# Altium PCB Lower1.1.PcbDoc (part 1 of 2)
Units mil, origin at the board's own origin, x right, y up, seen from the top; angles counter-clockwise.
Board outline 3366.33 x 5314.96 mil, 2 copper layers (Top Layer, Bottom Layer); 114 components, 117 nets, 417 pads, 111 vias.
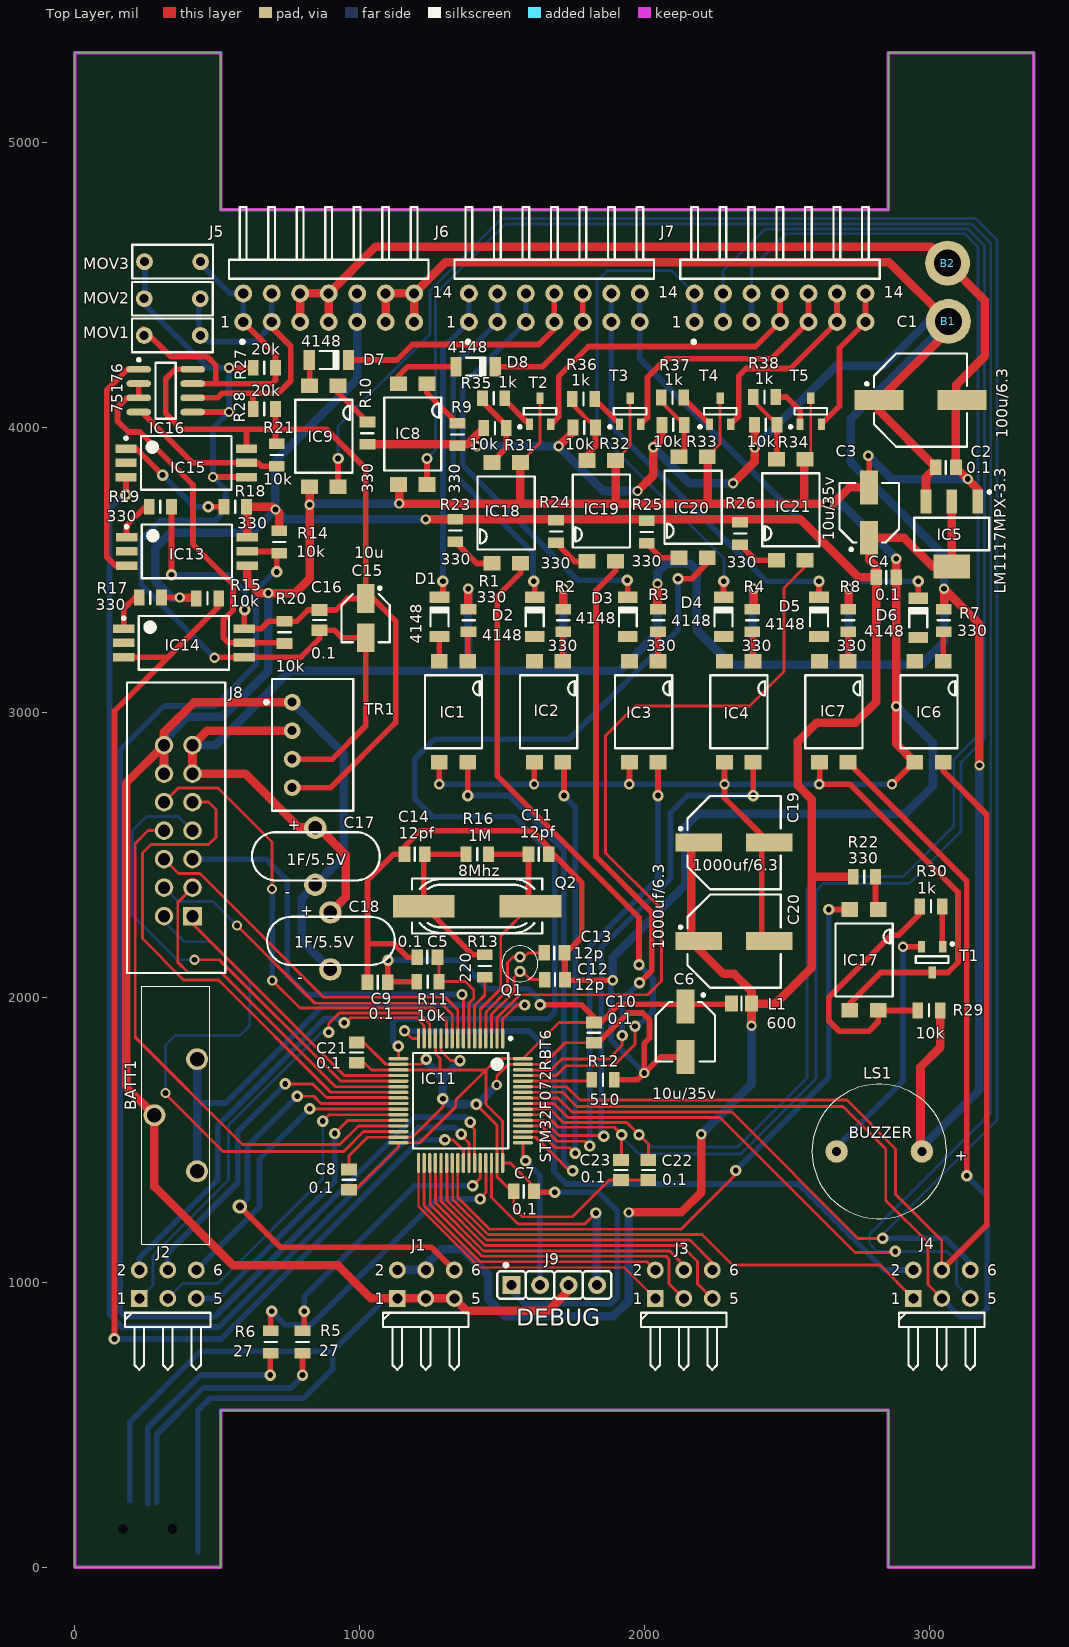
[diagram p0: Top Layer view]
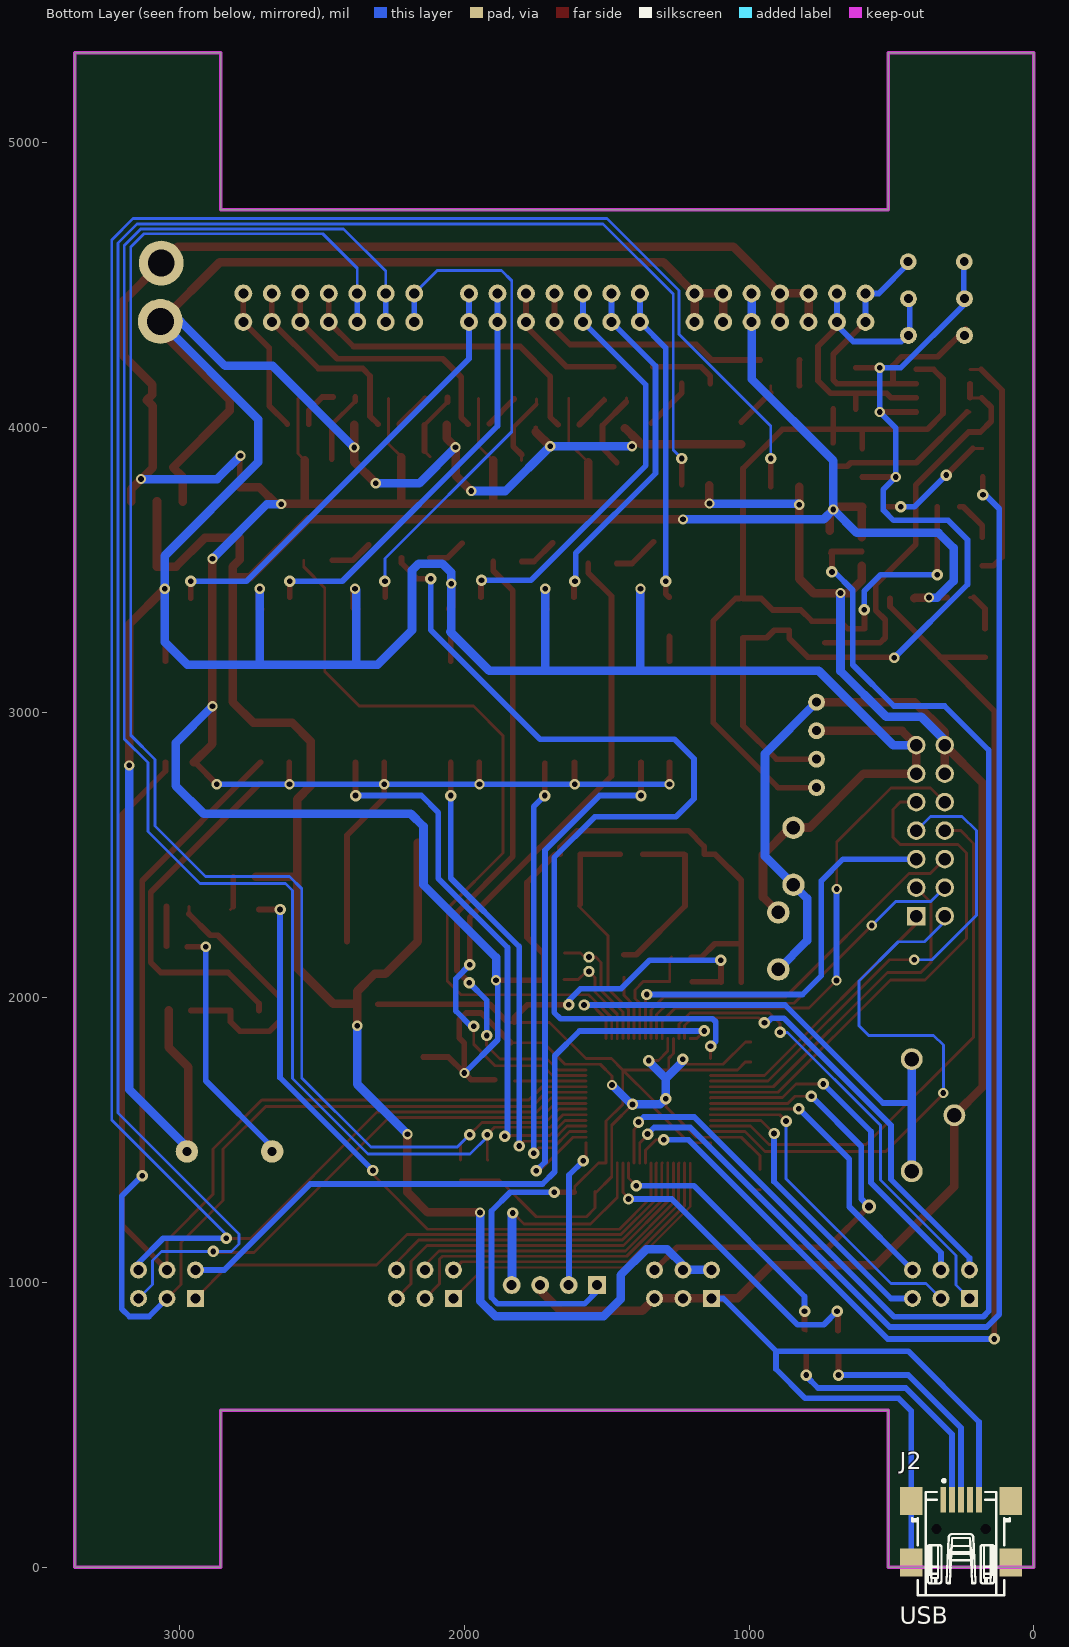
[diagram p1: Bottom Layer view, seen from below]
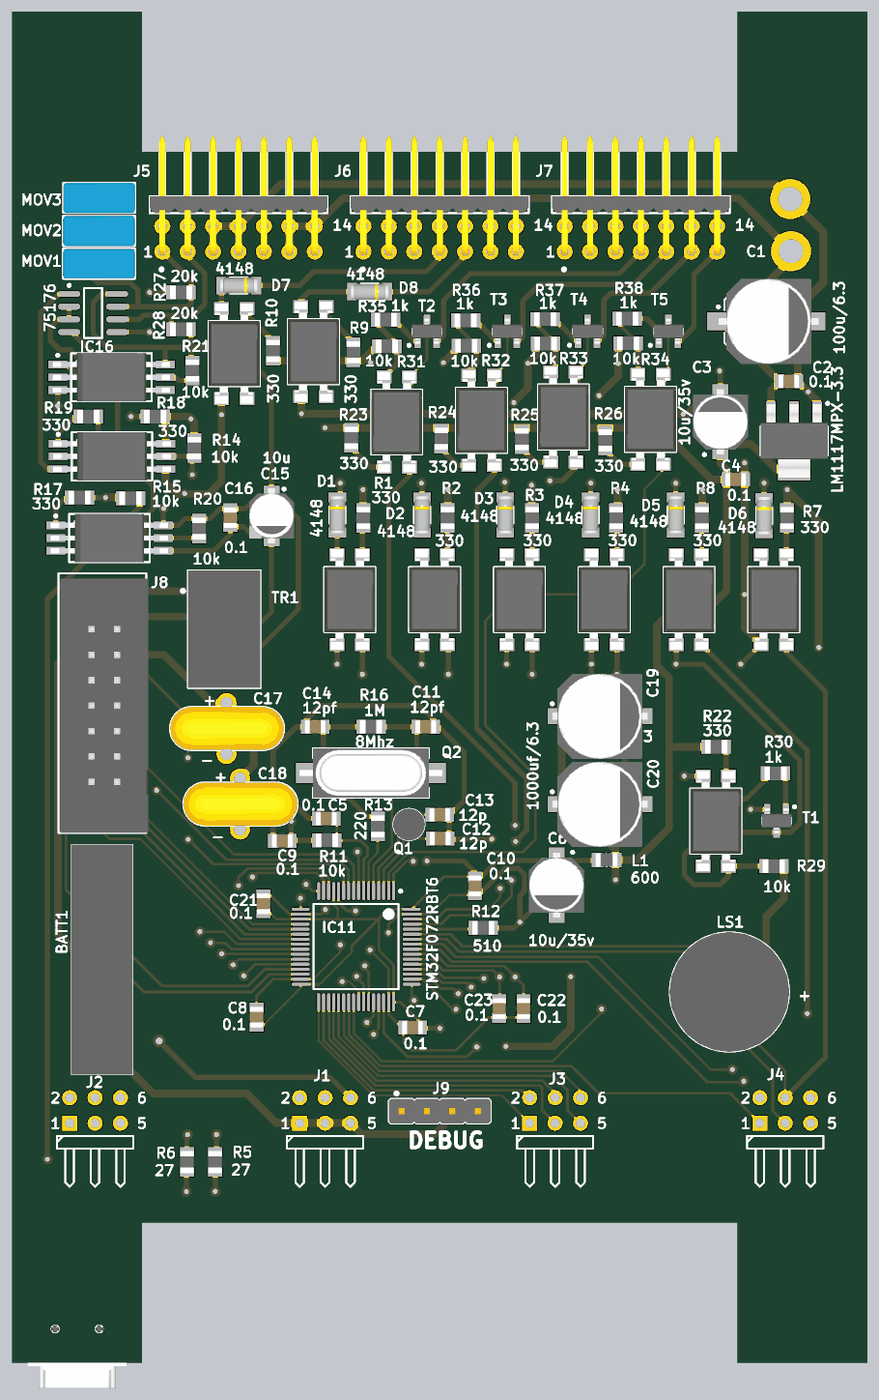
[diagram p3: 3D render of the assembled board from above, using the file's embedded part models]

## Layer stack, top to bottom
Top Solder: solder mask 0.4, Solder Resist, Dk 3.5
Top Layer: signal copper 1.4
Dielectric 1: dielectric 12.6, FR-4, Dk 4.8
Bottom Layer: signal copper 1.4
Bottom Solder: solder mask 0.4, Solder Resist, Dk 3.5

## Board outline
0,0 0,5314.96 511.81,5314.96 511.81,4763.78 2854.33,4763.78 2854.33,5314.96 3366.33,5314.96 3366.33,0 2854.52,0 2854.52,551.18 512,551.18 512,0

## Design rules (kind name [scope] priority, off if disabled: settings)
Clearance [All] p1: gap=7 ignorepadtopadclearanceinfootprint=FALSE
PolygonConnect [All] p1: connectstyle=Relief reliefconductorwidth=10 reliefentries=4 polygonreliefangle="90 Angle" airgapwidth=10
RoutingVias [All] p1: holewidth=28 width=50 viastyle="Through Hole" minholewidth=28 minwidth=50 maxholewidth=28 maxwidth=50
SolderMaskExpansion [All] p1: expansion=4
Width [All] p1: maxlimit=300 minlimit=7 preferedwidth=8
30 further rules are at their usual default settings.

## Components (designator, comment, footprint, x,y, rotation, side; value= is the part's Value field where it differs from the comment)
B1 "Plated Hole" MTG240_400 3066,4372 r90 top
B2 "Plated Hole" MTG240_400 3063,4577 r90 top
BATT1 "1074" 1074 429,1783 r270 top (schematic designator IC10)
C1 "100u/6.3" CAPAE830X1020N 2968,4096 r0 top value=100uF
C2 "0.1" CAPC2012X135N 3057,3860 r0 top value=100nF
C3 "10u/35v" CAPAE530X540N 2788,3701 r90 top value=10uF
C4 "0.1" CAPC2012X135N 2848,3474 r0 top value=100nF
C5 "0.1" CAPC2012X135N 1237,2141 r0 top value=100nF
C6 "10u/35v" CAPAE530X540N 2143,1879 r270 top value=10uF
C7 "0.1" CAPC2012X135N 1576,1319 r180 top value=100nF
C8 "0.1" CAPC2012X135N 962,1360 r90 top value=100nF
C9 "0.1" CAPC2012X135N 1063,2053 r180 top value=100nF
C10 "0.1" CAPC2012X135N 1822,1876 r270 top value=100nF
C11 "12pf" CAPC2012X135N 1628,2502 r180 top value=100nF
C12 "12p" CAPC2012X135N 1685,2062 r180 top value=12pF
C13 "12p" CAPC2012X135N 1683,2156 r0 top value=12pF
C14 "12pf" CAPC2012X135N 1193,2502 r180 top value=100nF
C15 "10u" CAPAE430X540N 1021,3331 r270 top value=10uF
C16 "0.1" CAPC2012X135N 859,3324 r270 top value=100nF
C17 "1F/5.5V" CAPRR590-430X1140X910 846,2495 r180 top
C18 "1F/5.5V" CAPRR590-430X1140X910 899,2198 r180 top
C19 "1000uf/6.3" CAPAE830X620N 2314,2543 r0 top
C20 "1000uf/6.3" CAPAE830X620N 2314,2197 r0 top
C21 "0.1" CAPC2012X135N 989,1806 r90 top value=100nF (schematic designator C8)
C22 "0.1" CAPC2012X135N 2013,1394 r270 top value=100nF (schematic designator C10)
C23 "0.1" CAPC2012X135N 1917,1394 r270 top value=100nF (schematic designator C10)
D1 "4148" DIOMELF3515N 1280,3335 r270 top
D2 "4148" DIOMELF3515N 1614,3335 r270 top
D3 "4148" DIOMELF3515N 1941,3335 r270 top
D4 "4148" DIOMELF3515N 2277,3335 r270 top
D5 "4148" DIOMELF3515N 2612,3335 r270 top
D6 "4148" DIOMELF3515N 2960,3332 r270 top
D7 "4148" DIOMELF3515N 892,4237 r180 top
D8 "4148" DIOMELF3515N 1407,4213 r180 top
IC1 "PC817" FAIRCHILD_FOD817DSD 1329,3002 r270 top
IC2 "PC817" FAIRCHILD_FOD817DSD 1662.8,3002 r270 top
IC3 "PC817" FAIRCHILD_FOD817DSD 1996.6,3002 r270 top
IC4 "PC817" FAIRCHILD_FOD817DSD 2330.4,3002 r270 top
IC5 "LM1117MPX-3.3" SOT230P700X180-4N 3078,3626 r270 top
IC6 "PC817" FAIRCHILD_FOD817DSD 2998,3002 r270 top
IC7 "PC817" FAIRCHILD_FOD817DSD 2664.2,3002 r270 top
IC8 "PC817" FAIRCHILD_FOD817DSD 1186,3977 r270 top
IC9 "PC817" FAIRCHILD_FOD817DSD 874,3969 r270 top
IC11 "STM32F072RBT6" LQFP64_N 1354,1637 r270 top
IC13 "ACPL-W60L-000E" SOIC127P1150X360-6N 393,3565 r0 top
IC14 "ACPL-W60L-000E" SOIC127P1150X360-6N 383,3244 r0 top
IC15 "ACPL-W60L-000E" SOIC127P1150X360-6N 391,3876 r0 top
IC16 "75176" SO8_N 319,4129 r0 top
IC17 "PC817" FAIRCHILD_FOD817DSD 2770,2131 r270 top
IC18 "PC817" FAIRCHILD_FOD817DSD 1514,3700 r90 top
IC19 "PC817" FAIRCHILD_FOD817DSD 1848,3707 r90 top
IC20 "PC817" FAIRCHILD_FOD817DSD 2170,3720 r90 top
IC21 "PC817" FAIRCHILD_FOD817DSD 2513,3711 r90 top
J1 "Header 3X2H" HDR2X3H 1131.92,943 r0 top locked (schematic designator P1)
J2 "Header 3X2H" HDR2X3H 226.38,943 r0 top locked (schematic designator P2)
J2 "USB" TYCO_1734035-1 255.91,236.22 r180 bottom
J3 "Header 3X2H" HDR2X3H 2037.46,943 r0 top locked (schematic designator P3)
J4 "Header 3X2H" HDR2X3H 2943,943 r0 top locked (schematic designator P4)
J5 "Header 14" STELVIO-KONTEK_3910401114400 891,4420.47 r0 top locked (schematic designator J1)
J6 "Header 14" STELVIO-KONTEK_3910401114400 1683,4420.47 r0 top locked (schematic designator J3)
J7 "Header 14" STELVIO-KONTEK_3910401114400 2475,4420.47 r0 top locked (schematic designator J4)
J8 "30314-6002HB" SHDR14W64P254_2X7_2540X878X955P 413,2285 r90 top (schematic designator J5)
J9 "DEBUG" COMATEL_385.0358.1.04.400 1533,990 r0 top (schematic designator W1)
L1 "600" INDC2012X105N 2340,1978 r180 top value=220R@100MHz
LS1 "CPI-137-12T" CMI1295IC0585T 2973,1459 r180 top
MOV1 "10nF" CAPR500-300X720X650 342,4323 r0 top
MOV2 "10nF" CAPR500-300X720X650 343,4582 r0 top
MOV3 "10nF" CAPR500-300X720X650 342,4452 r0 top
Q1 "32.768k" AB38T32768KHZ 1562,2091 r180 top
Q2 "8Mhz" XTAL1160X490X430 1412,2320.33 r0 top value=6MHz
R1 "330" RESC2012X60N 1382,3323 r90 top
R2 "330" RESC2012X60N 1714,3323 r90 top
R3 "330" RESC2012X60N 2047,3323 r90 top
R4 "330" RESC2012X60N 2378,3323 r90 top
R5 "27" RESC2012X60N 799,790 r270 top
R6 "27" RESC2012X60N 688,790 r270 top
R7 "330" RESC2012X60N 3050,3323 r90 top
R8 "330" RESC2012X60N 2715,3323 r90 top
R9 "330" RESC2012X60N 1343,3975 r270 top
R10 "330" RESC2012X60N 1027,3980 r270 top
R11 "10k" RESC2012X60N 1239,2055 r180 top
R12 "510" RESC2012X60N 1854,1711 r180 top
R13 "220" RESC2012X60N 1439,2110 r270 top
R14 "10k" RESC2012X60N 717,3598 r90 top
R15 "10k" RESC2012X60N 466,3400 r180 top
R16 "1M" RESC2012X60N 1412.47,2502 r180 top
R17 "330" RESC2012X60N 265,3403 r0 top
R18 "330" RESC2012X60N 563,3722 r0 top
R19 "330" RESC2012X60N 300,3722 r0 top
R20 "10k" RESC2012X60N 736,3281 r90 top
R21 "10k" RESC2012X60N 709,3903 r90 top
R22 "330" RESC2012X60N 2771,2423 r180 top
R23 "330" RESC2012X60N 1335,3638 r90 top
R24 "330" RESC2012X60N 1689,3635 r90 top
R25 "330" RESC2012X60N 2007,3633 r90 top
R26 "330" RESC2012X60N 2335,3628 r90 top
R27 "20k" RESC2012X60N 665,4210 r180 top
R28 "20k" RESC2012X60N 665,4065 r180 top
R29 "10k" RESC2012X60N 2998,1954 r0 top
R30 "1k" RESC2012X60N 3005,2319 r180 top
R31 "10k" RESC2012X60N 1475,3998 r180 top
R32 "10k" RESC2012X60N 1788,4000 r180 top
R33 "10k" RESC2012X60N 2100,4009 r180 top
R34 "10k" RESC2012X60N 2425,4010 r180 top
R35 "1k" RESC2012X60N 1470,4103 r180 top
R36 "1k" RESC2012X60N 1785,4100 r180 top
R37 "1k" RESC2012X60N 2098,4105 r180 top
R38 "1k" RESC2012X60N 2421,4107 r180 top
T1 "MMBT3906LT1G" SOT95P240X110-3N 3009,2132 r270 top
T2 "MMBT3906LT1G" SOT95P240X110-3N 1633,4057 r90 top
T3 "MMBT3906LT1G" SOT95P240X110-3N 1949,4057 r90 top
T4 "MMBT3906LT1G" SOT95P240X110-3N 2265,4057 r90 top
T5 "MMBT3906LT1G" SOT95P240X110-3N 2583,4057 r90 top
TR1 "Comment" DCDC_TRACO_TME24 763,2886 r270 top

## Footprints (in the part's own frame and the unit in brackets; to place one, negate y for a bottom-side part, rotate by r counter-clockwise, add the part's x,y. Pads: shape width x height; smd on the part's side, far side on the other; paste and mask are expansions set on the pad)
1074 [mm]
  round 1.95 hole 1.3: 1(0,0) 2(5,-3.8) 3(10,0)
  silkscreen extent -6.5,-4.95 16.5,1.15, body extent -6.5,-4.95 16.5,1.15, height 18.4
AB38T32768KHZ [mm]
  round 1 hole 0.55: 1(0,0) 2(0,-1.27)
  silkscreen extent -1.6,-2.27 1.6,0.92, body extent -1.6,-2.28 1.6,0.92, height 8.4
CAPAE430X540N [mm] "Capacitor, Aluminium Electrolytric, 4.3mm L X 4.3mm W X 5.4mm H, IPC Medium Density"
  rect 2.55x1.6 smd: 1(-1.75,0) 2(1.75,0)
  silkscreen extent -2.8,-2.15 2.15,2.15, body extent -2.75,-2.25 2.75,2.25, height 5.7
CAPAE530X540N [mm] "Capacitor, Aluminium Electrolytric, 5.3mm L X 5.3mm W X 5.4mm H, IPC Medium Density"
  rect 3x1.6 smd: 1(-2.25,0) 2(2.25,0)
  silkscreen extent -3.4,-2.65 2.65,2.65, body extent -3.25,-2.75 3.25,2.75, height 5.7
CAPAE830X620N [mm] "Capacitor, Aluminium Electrolytric, 8.3mm L X 8.3mm W X 6.2mm H, IPC Medium Density"
  rect 4.15x1.6 smd: 1(-3.15,0) 2(3.15,0)
  silkscreen extent -4.9,-4.15 4.15,4.15, body extent -4.75,-4.25 4.75,4.25, height 6.2
CAPAE830X1020N [mm] "Capacitor, Aluminium Electrolytric, 8.3mm L X 8.3mm W X 10.2mm H, IPC Medium Density"
  rect 4.4x1.8 smd: 1(-3.7,0) 2(3.7,0)
  silkscreen extent -4.9,-4.15 4.15,4.15, body extent -4.75,-4.25 5.25,4.25, height 10.2
CAPC2012X135N [mm] "Chip Capacitor, Body 2.0x1.25mm, IPC Medium Density"
  rect 1.05x1.4 smd: 1(-0.9,0) 2(0.9,0)
  silkscreen extent 0,-0.58 0,0.58, body extent -1.05,-0.67 1.05,0.68, height 1.25
CAPR500-300X720X650 [mm] "Capacitor Radial, Pin spacing 5.0mm - Body With 3.0mm X Body Length 7.2mm X Body Height 6.5mm"
  round 1.5 hole 0.8: 1(-2.5,0) 2(2.5,0)
  silkscreen extent -3.6,-1.5 3.6,1.5, body extent -3.6,-1.5 3.6,1.5, height 6.5
CAPRR590-430X1140X910 [mm] "Capacitor Radial Rounded, Pin spacing 5.9mm - Body With 4.3mm X Body Length 11.4mm X Body Height 9.1mm"
  round 2 hole 1.2: 1(0.051,-2.54) 2(0.051,2.54)
  silkscreen extent -5.7,-2.15 5.7,2.15, body extent -5.7,-2.15 5.7,2.15, height 10.95
CMI1295IC0585T [mm]
  round 2 hole 0.8: 1(0,0) 2(7.6,0)
  silkscreen extent -2.2,-6 9.8,6, body extent -2.2,-6 9.8,6, height 9.8
COMATEL_385.0358.1.04.400 [mm] "4 Contacts Straight Strip Header Pitch 2.54mm L=6.3mm ''Mini-Wire-Wrap''"
  rect 1.6x1.6 hole 0.9: 1(0,0)
  round 1.6 hole 0.9: 2(2.54,0) 3(5.08,0) 4(7.62,0)
  silkscreen extent -1.27,-1.22 8.89,1.93, body extent -1.27,-1.22 8.89,1.23, height 8
DCDC_TRACO_TME24 [mm] "TME Series , Body 11.75x7.25mm, SIP-4 Package"
  round 1.5 hole 0.8: 1(-3.81,0) 2(-1.27,0) 3(1.27,0) 4(3.81,0)
  silkscreen extent -5.88,-2.45 5.88,5.45, body extent -5.87,-1.8 5.88,5.45, height 10.45
DIOMELF3515N [mm] "SOD80C, MELF Diode, 2-Leads, Body 3.5x1.5mm, IPC Medium Density"
  rect 1x1.75 smd: 1(-1.75,0) 2(1.75,0)
  silkscreen extent -0.85,-0.8 0.85,0.8, body extent -1.85,-0.8 1.85,0.8, height 1.6
FAIRCHILD_FOD817DSD [mm] "SOIC, 2.54mm Pitch, 4 Pin, Body 6.5mm W X 4.6mm L X 4.6mm H"
  rect 1.3x1.5 smd: 1(-4.5,1.27) 2(-4.5,-1.27) 3(4.5,-1.27) 4(4.5,1.27)
  silkscreen extent -3.25,-2.55 3.25,2.55, body extent -5.01,-2.55 5.02,2.55, height 4.06
HDR2X3H [mm] "Connector; Header; 3x2 Position; Right Angle"
  rect 1.5x1.5 hole 0.9: 1(0,0)
  round 1.5 hole 0.9: 2(0,2.54) 3(2.54,0) 4(2.54,2.54) 5(5.08,0) 6(5.08,2.54)
  silkscreen extent -1.27,-6.35 6.35,-1.27
INDC2012X105N [mm] "Chip Inductor, EIA 0805, Metric 2012, Body 2.0x1.25mm, IPC Medium Density"
  rect 1.15x1.45 smd: 1(-0.9,0) 2(0.9,0)
  silkscreen extent 0,-0.6 0,0.6, body extent -1.1,-0.7 1.1,0.7, height 1.1
LQFP64_N [mm] "Thin QFP, 64-Leads, Body 10x10mm, Pitch 0.5mm, IPC Medium Density"
  oval 1.8x0.3 smd: 1(-5.55,3.75) 2(-5.55,3.25) 3(-5.55,2.75) 4(-5.55,2.25) 5(-5.55,1.75) 6(-5.55,1.25) 7(-5.55,0.75) 8(-5.55,0.25) 9(-5.55,-0.25) 10(-5.55,-0.75) 11(-5.55,-1.25) 12(-5.55,-1.75) 13(-5.55,-2.25) 14(-5.55,-2.75) 15(-5.55,-3.25) 16(-5.55,-3.75) 33(5.55,-3.75) 34(5.55,-3.25) 35(5.55,-2.75) 36(5.55,-2.25) 37(5.55,-1.75) 38(5.55,-1.25) 39(5.55,-0.75) 40(5.55,-0.25) 41(5.55,0.25) 42(5.55,0.75) 43(5.55,1.25) 44(5.55,1.75) 45(5.55,2.25) 46(5.55,2.75) 47(5.55,3.25) 48(5.55,3.75)
  oval 0.3x1.8 smd: 17(-3.75,-5.55) 18(-3.25,-5.55) 19(-2.75,-5.55) 20(-2.25,-5.55) 21(-1.75,-5.55) 22(-1.25,-5.55) 23(-0.75,-5.55) 24(-0.25,-5.55) 25(0.25,-5.55) 26(0.75,-5.55) 27(1.25,-5.55) 28(1.75,-5.55) 29(2.25,-5.55) 30(2.75,-5.55) 31(3.25,-5.55) 32(3.75,-5.55) 49(3.75,5.55) 50(3.25,5.55) 51(2.75,5.55) 52(2.25,5.55) 53(1.75,5.55) 54(1.25,5.55) 55(0.75,5.55) 56(0.25,5.55) 57(-0.25,5.55) 58(-0.75,5.55) 59(-1.25,5.55) 60(-1.75,5.55) 61(-2.25,5.55) 62(-2.75,5.55) 63(-3.25,5.55) 64(-3.75,5.55)
  silkscreen extent -5.67,-4.25 4.25,4.57, body extent -5,-5 5,5, height 1.6
MTG240_400 [mm] "Plated Through Hole: Hole Dia.=2.4mm Pad Dia.=4.0mm"
  round 4 hole 2.4: 1(0,0)
RESC2012X60N [mm] "Chip Resistor, EIA 0805, Metric 2012, Body 2.0x1.2mm, IPC Medium Density"
  rect 0.95x1.4 smd: 1(-1,0) 2(1,0)
  silkscreen extent 0,-0.55 0,0.55, body extent -1.1,-0.67 1.1,0.68, height 0.6
SHDR14W64P254_2X7_2540X878X955P [mm]
  rect 1.65x1.65 hole 1.1: 1(0,0)
  round 1.65 hole 1.1: 2(0,2.54) 3(2.54,0) 4(2.54,2.54) 5(5.08,0) 6(5.08,2.54) 7(7.62,0) 8(7.62,2.54) 9(10.16,0) 10(10.16,2.54) 11(12.7,0) 12(12.7,2.54) 13(15.24,0) 14(15.24,2.54)
  silkscreen extent -5.08,-2.93 20.83,5.85, body extent -5.08,-3.12 20.32,5.66, height 9.55
SO8_N [mm] "SOIC, 8-Leads, Body 4.9x3.9mm, Pitch 1.27mm, IPC Medium Density"
  oval 2.2x0.6 smd: 1(-2.4,1.905) 2(-2.4,0.635) 3(-2.4,-0.635) 4(-2.4,-1.905) 5(2.4,-1.905) 6(2.4,-0.635) 7(2.4,0.635) 8(2.4,1.905)
  silkscreen extent -2.52,-2.5 0.9,2.88, body extent -2,-2.5 2,2.5, height 1.75
SOIC127P1150X360-6N [mm] "SOIC, 1.27mm Pitch; 6 Pin, 6.90mm W X 4.70mm L X 3.60mm H Body, IPC Medium Density"
  rect 1.91x0.76 smd: 1(-5.37,1.27) 2(-5.37,0) 3(-5.37,-1.27) 4(5.37,-1.27) 5(5.37,0) 6(5.37,1.27)
  silkscreen extent -5.49,-2.4 4.02,2.4, body extent -5.87,-2.42 5.88,2.42, height 3.6
SOT95P240X110-3N [mm] "SOT23 3-Leads, Pitch 0.95mm - Body 1.3x2.9mm, IPC Medium Density"
  rect 1.05x0.65 smd: 1(-1.15,0.95) 2(-1.15,-0.95) 3(1.15,0)
  silkscreen extent -1.52,-1.45 0.3,1.92, body extent -1.25,-1.5 1.25,1.5, height 1.1
SOT230P700X180-4N [mm] "SOT223, 2.30mm pitch; 3 pin, 3.70mm W X 6.70mm L, IPC Medium Density"
  rect 2.15x0.95 smd: 1(-2.9,2.3) 2(-2.9,0) 3(-2.9,-2.3)
  rect 2.15x3.25 smd: 4(2.9,0)
  silkscreen extent -3.87,-3.35 1.45,3.48, body extent -3.65,-3.35 3.65,3.35, height 1.81
STELVIO-KONTEK_3910401114400 [mm] "14 Contacts - Pitch 2.54mm - Dual Row Right Angle Strip Header - Insulator 1.7mm"
  round 1.6 hole 0.9: 1(-7.62,-1.27) 2(-7.62,1.27) 3(-5.08,-1.27) 4(-5.08,1.27) 5(-2.54,-1.27) 6(-2.54,1.27) 7(0,-1.27) 8(0,1.27) 9(2.54,-1.27) 10(2.54,1.27) 11(5.08,-1.27) 12(5.08,1.27) 13(7.62,-1.27) 14(7.62,1.27)
  silkscreen extent -8.89,-3.2 8.89,8.97, body extent -8.89,-1.57 8.89,10.27, height 5.57
TYCO_1734035-1 [mm] "SMD, Right Angle, 5 Position, Type B, Mini USB Receptacle"
  rect 0.5x2.3 smd: 1(-1.575,0) 2(-0.8,0) 3(0,0) 4(0.8,0) 5(1.6,0)
  rect 2x2.5 smd: 6(-4.45,-5.6) 6(-4.45,-0.1) 6(4.45,-5.6) 6(4.45,-0.1)
  round 0.5 hole 0.9 unplated mask+0.2: MTG1(-2.2,-2.6) MTG2(2.2,-2.6)
  silkscreen extent -4.35,-8.5 4.35,1.82, body extent -4.95,-8.5 4.95,0.7, height 4.14
XTAL1160X490X430 [mm] "HC49/4H SMX Case, SMD Cristal, Body 11.6x4.9mm"
  rect 5.5x2 smd: 1(-4.75,0) 2(4.75,0)
  silkscreen extent -5.8,-2.45 5.8,2.45, body extent -7.15,-2.45 7.15,2.45, height 4.3

## Part data
B1 B2: library part PLATED_HOLE2.4_PAD4.0, "Single Terminal Socket", Author="CERN DEM JMW", ComponentHeight=0mm, Component Type="Standard (No BOM)", CreateDate=10/10/2554, Family="Plated Hole", LatestRevisionDate=10/10/2554, Mounted=No, PackageDescription="Plated Through Hole: Hole Dia.=2.4mm Pad Dia.=4.0mm", Part Description="Plated Through Hole: Hole Dia.=2.4mm Pad Dia.=4.0mm", Part Number=PLATED_HOLE2.4_PAD4.0, Pin Count=1, SMD=No, Socket=No, Status=None, Table=Pads
BATT1: "0197-0004-2", Manufacturer_Name="Keystone Electronics", Mouser2 Part Number=534-1074, Datasheet Link=https://componentsearchengine.com//1074.pdf, Height=18.3mm, Manufacturer_Part_Number=1074, Mouser2 Price/Stock=https://www.mouser.com/Search/Refine.aspx?Keyword=534-1074
C1: library part CAE830-1020_100UF_35V_20%, "0289-0158-4", Case=F, Manufacturer=GENERIC, Manufacturer1 ComponentHeight=10.2mm, Manufacturer1 Example=PANASONIC, Manufacturer1 Part Number=EEEFK1V101AP, Tolerance=±20%, Voltage=35V, Author="CERN DEM JLC", Component Type=Standard, CreateDate=3/12/2550, HelpURL=\\cern.ch\dfs\Applications\Altium\Datasheets\CAE_PANASONIC_FK.pdf, LatestRevisionDate=3/12/2550, Manufacturer Part Number=CAE830-1020_100UF_35V_20%, Mounted=Yes, Part Description="Aluminum Electrolytic SMT Capacitor", Part Number=CAE830-1020_100UF_35V_20%, Pin Count=2, SMD=Yes, Socket=No, Status="Not Recommended", Table="Capacitors SMD"
C2 C4 C5 C7 C8 C9 C10 C16 C21 C22 C23: library part CC0805_100NF_50V_10%_X7R, "0092-0004-8", Case=0805, Manufacturer=GENERIC, Manufacturer1 ComponentHeight=1.35mm, Manufacturer1 Example=EPCOS, Manufacturer1 Part Number=B37941K5104K62, Tolerance=±10%, Voltage=50V, Author="CERN DEM JLC", Component Type=Standard, CreateDate=3/12/2550, HelpURL=\\cern.ch\dfs\Applications\Altium\Datasheets\CC0805_X7R_EPCOS.pdf, LatestRevisionDate=3/12/2550, Manufacturer Part Number=CC0805_100NF_50V_10%_X7R, Mounted=Yes, Part Description="SMD Multilayer Chip Ceramic Capacitor", Part Number=CC0805_100NF_50V_10%_X7R, Pin Count=2, SMD=Yes, Socket=No, Status=Preferred, Table="Capacitors SMD", TC=X7R
C3 C6: library part CAE530-540_10UF_35V_20%, "0289-0032-3", Case=C, Manufacturer=GENERIC, Manufacturer1 ComponentHeight=5.8mm, Manufacturer1 Example=PANASONIC, Manufacturer1 Part Number=EEEFK1V100AR, Tolerance=±20%, Voltage=35V, Author="CERN DEM JLC", Component Type=Standard, CreateDate=3/12/2550, HelpURL=\\cern.ch\dfs\Applications\Altium\Datasheets\CAE_PANASONIC_FK.pdf, LatestRevisionDate=3/12/2550, Manufacturer Part Number=CAE530-540_10UF_35V_20%, Mounted=Yes, Part Description="Aluminum Electrolytic SMT Capacitor", Part Number=CAE530-540_10UF_35V_20%, Pin Count=2, SMD=Yes, Socket=No, Status="Not Recommended", Table="Capacitors SMD"
C11 C14: library part CC0805_100NF_50V_10%_X7R, "0306-0172-8", Case=0805, Manufacturer=GENERIC, Manufacturer1 ComponentHeight=1.35mm, Manufacturer1 Example=EPCOS, Manufacturer1 Part Number=B37941K5104K62, Tolerance=±10%, Voltage=50V, Author="CERN DEM JLC", Component Type=Standard, CreateDate=3/12/2550, HelpURL=\\cern.ch\dfs\Applications\Altium\Datasheets\CC0805_X7R_EPCOS.pdf, LatestRevisionDate=3/12/2550, Manufacturer Part Number=CC0805_100NF_50V_10%_X7R, Mounted=Yes, Part Description="SMD Multilayer Chip Ceramic Capacitor", Part Number=CC0805_100NF_50V_10%_X7R, Pin Count=2, SMD=Yes, Socket=No, Status=Preferred, Table="Capacitors SMD", TC=X7R
C12 C13: library part CC0805_12PF_50V_5%_NP0, "0306-0172-8", Case=0805, Manufacturer=GENERIC, Manufacturer1 ComponentHeight=1.35mm, Manufacturer1 Example=PHYCOMP, Manufacturer1 Part Number=223886115129, Tolerance=±5%, Voltage=50V, Author="CERN DEM JLC", Component Type=Standard, CreateDate=3/12/2550, HelpURL=\\cern.ch\dfs\Applications\Altium\Datasheets\CC0805_NP0_PHYCOMP.pdf, LatestRevisionDate=3/12/2550, Manufacturer Part Number=CC0805_12PF_50V_5%_NP0, Mounted=Yes, Part Description="SMD Multilayer Chip Ceramic Capacitor", Part Number=CC0805_12PF_50V_5%_NP0, Pin Count=2, SMD=Yes, Socket=No, Status=Preferred, Table="Capacitors SMD", TC=NP0
C15: library part CAE430-540_10UF_16V_20%, "0289-0167-5", Case=B, Manufacturer=GENERIC, Manufacturer1 ComponentHeight=5.8mm, Manufacturer1 Example=PANASONIC, Manufacturer1 Part Number=EEEFK1C100AR, Tolerance=±20%, Voltage=16V, Author="CERN DEM JLC", Component Type=Standard, CreateDate=3/12/2550, HelpURL=\\cern.ch\dfs\Applications\Altium\Datasheets\CAE_PANASONIC_FK.pdf, LatestRevisionDate=3/12/2550, Manufacturer Part Number=CAE430-540_10UF_16V_20%, Mounted=Yes, Part Description="Aluminum Electrolytic SMT Capacitor", Part Number=CAE430-540_10UF_16V_20%, Pin Count=2, SMD=Yes, Socket=No, Status="Not Recommended", Table="Capacitors SMD"
C17 C18: library part CMIC_39PF_500V_0.5PF_590-430X11400X910, "0102-0039-2 Super Capacitor"
C19 C20: library part CAE830-620_330UF_6.3V_20%, "0289-0158-4"
D1 D2 D3 D4 D5 D6 D7 D8: library part BZV55-B2V4, "0016-0201-3"
IC1 IC2 IC3 IC4 IC6 IC7 IC8 IC9 IC17 IC18 IC19 IC20 IC21: library part FOD817DSD, "0084-0064-6  opto", Case=SOIC4, Manufacturer="FAIRCHILD SEMICONDUCTOR", Author="CERN DEM JLC", ComponentHeight=4.6mm, Component Type=Standard, CreateDate=21/7/2557, Device=FOD817DSD, HelpURL=\\cern.ch\dfs\Applications\Altium\Datasheets\FOD817DSD.pdf, LatestRevisionDate=21/7/2557, Manufacturer Part Number=FOD817DSD, Mounted=Yes, PackageDescription="SOIC, 2.54mm Pitch, 4 Pin, Body 6.5mm W X 4.6mm L X 4.6mm H", Part Description="4-Pin High Operating Temperature Phototransistor Optocoupler", Part Number=FOD817DSD, Pin Count=4, SMD=Yes, Socket=No, Table=Optocouplers
IC5: library part LM1117MPX-ADJ/NOPB, "0083-0491-4", Case=SOT223, Manufacturer="NATIONAL SEMICONDUCTOR", Author="CERN DEM JLC", ComponentHeight=1.8mm, Component Type=Standard, CreateDate=5/7/2553, Device=LM1117MPX-ADJ/NOPB, HelpURL=\\cern.ch\dfs\Applications\Altium\Datasheets\LM1117MPX-ADJ-NOPB.pdf, LatestRevisionDate=5/7/2553, Manufacturer Part Number=LM1117MPX-ADJ/NOPB, Mounted=Yes, PackageDescription="SOT223, 2.30mm pitch; 3 pin, 3.70mm W X 6.70mm L, IPC Medium Density", Part Description="1.25V to 13.8V, 800mA, Adjustable Low-Dropout Linear Regulator", Part Number=LM1117MPX-ADJ/NOPB, Pin Count=4, SMD=Yes, Socket=No, Table=Regulators
IC11: library part STM32F103R8T6, "STM32 ARM-based 32-bit MCU with 64 Kbytes Flash, 64-pin LQFP, Industrial Temperature", ComponentLink1Description="Manufacturer Link", ComponentLink1URL=www.st.com/stm32, ComponentLink2Description=Datasheet, ComponentLink2URL=http://www.st.com/stonline/products/literature/ds/13587.pdf, DatasheetVersion="rev6, Mar-2008", PackageDescription="64-Pin Low-Profile Quad Flat Pack, 10 x 10 mm Body, 0.5 mm Pitch (LQFP64)", PackageReference=LQFP64, PackageVersion=Mar-2008, Published=30-May-2008, Publisher="Altium Limited"
IC13 IC14 IC15: "0087-0267-8", Case=SOIC6, Manufacturer="AVAGO TECHNOLOGIES", Author="CERN DEM JMW", ComponentHeight=3.6mm, Component Type=Standard, CreateDate=26/2/2557, Device=ACPL-W60L-000E, HelpURL=\\cern.ch\dfs\Applications\Altium\Datasheets\ACPL-W60L-000E.pdf, LatestRevisionDate=26/2/2557, Manufacturer Part Number=ACPL-W60L-000E, Mounted=Yes, PackageDescription="SOIC, 1.27mm Pitch; 6 Pin, 6.90mm W X 4.70mm L X 3.60mm H Body, IPC Medium Density", Part Description="High Speed LVTTL Compatible 3.3Volt/5Volt Optocoupler", Part Number=ACPL-W60L-000E, Pin Count=6, SMD=Yes, Socket=No, Table=Optocouplers
IC16: library part SN75176, "0086-0274-6"
J1 J2 J3 J4: "Header, 3-Pin, Dual row, Right Angle", LatestRevisionDate=17-Jul-2002, LatestRevisionNote="Re-released for DXP Platform.", Publisher="Altium Limited"
J2: library part TYCO_1734035-1, "0007-1328-2", Manufacturer="TYCO ELECTRONICS", Manufacturer Part Number=1734035-1, Author="CERN DEM JLC", ComponentHeight=3.95mm, Component Type=Standard, CreateDate=2/5/2554, Family=USB, HelpURL=\\cern.ch\dfs\Applications\Altium\Datasheets\TYCO_1734035-1.pdf, LatestRevisionDate=2/5/2554, Mounted=Yes, Part Description="5 Position, Right Angle, SMD Mini USB Type B Receptacle", Part Number=TYCO_1734035-1, Pin Count=6, SMD=Yes, Socket=No, Status=None, Table=TYCO
J5 J6 J7: library part STELVIO-KONTEK_3910401114400, "Connector 14 Male", Manufacturer=STELVIO-KONTEK, Manufacturer Part Number=3910401114400, Author="CERN DEM JLC", ComponentHeight=5.7mm, Component Type=Standard, CreateDate=29/8/2556, Family="Header 14", HelpURL=\\cern.ch\dfs\Applications\Altium\Datasheets\STELVIO-KONTEK_3910401114400.pdf, LatestRevisionDate=29/8/2556, Mounted=Yes, Part Description="14 Contacts - Pitch 2.54mm - Dual Row Right Angle Strip Header - Insulator 1.7mm", Part Number=STELVIO-KONTEK_3910401114400, Pin Count=14, SMD=No, Socket=No, Status=None, Table="STELVIO-KONTEK COMATEL"
J8: "0007-0649-2", Manufacturer_Name=3M, Datasheet Link=https://componentsearchengine.com/Datasheets/2/30314-6002HB.pdf, Height=9.554mm, Manufacturer_Part_Number=30314-6002HB
J9: library part COMATEL_385.0358.1.04.400, "4 Mini Wire-Wrap Contact Strip Header", Manufacturer="KONTEK COMATEL", Manufacturer Part Number=385.0358.1.04.400, Author="CERN DEM JLC", ComponentHeight=8mm, Component Type=Standard, CreateDate=30/6/2553, Family="Test Point", HelpURL=\\cern.ch\dfs\Applications\Altium\Datasheets\COMATEL_385.0358.1.04.400.pdf, LatestRevisionDate=10/10/2555, Mounted=Yes, Part Description="4 Contacts Straight Strip Header Pitch 2.54mm L=6.3mm ''Mini-Wire-Wrap''", Part Number=COMATEL_385.0358.1.04.400, Pin Count=4, SMD=No, Socket=No, Status="Not recommended", Table="STELVIO-KONTEK COMATEL"
L1: library part IND0805_MURATA_BLM21PG221SN1D, "0169-0010-4", Case=0805, Manufacturer=MURATA, Manufacturer Part Number=BLM21PG221SN1D, Power=2A, Resistance=0.05R, Tolerance=±25%, Author="CERN DEM JLC", ComponentHeight=1.05mm, Component Type=Standard, CreateDate=25/1/2553, HelpURL=\\cern.ch\dfs\Applications\Altium\Datasheets\IND0402_MURATA_BLM21P.pdf, LatestRevisionDate=25/1/2553, Mounted=Yes, Part Description="SMD EMIFIL Suppression Chip Ferrite Bead", Part Number=IND0805_MURATA_BLM21PG221SN1D, Pin Count=2, SMD=Yes, Socket=No, Status=None, Table="Inductors SMD"
LS1: "0044-0006-8  Buzzer", Manufacturer_Name="CUI Devices", Datasheet Link=https://componentsearchengine.com/Datasheets/1/CPI-137-12T.pdf, Height=8mm, Manufacturer_Part_Number=CPI-137-12T
MOV1 MOV2 MOV3: library part CPER_10NF_400V_10%_500-300X720X650, "0221-0014-7", Case="LS5 W3 x L7.2 x H6.5", Manufacturer=EPCOS, Manufacturer Part Number=B32529C6103K000, Tolerance=±10%, Voltage=400VDC/200VAC, Author="CERN DEM JLC", ComponentHeight=6.5mm, Component Type=Standard, CreateDate=23/3/2552, HelpURL=\\cern.ch\dfs\Applications\Altium\Datasheets\CPER_EPCOS_B32529.pdf, LatestRevisionDate=23/3/2552, Mounted=Yes, Part Description="Metallized Polyester Film Capacitor (MKT)", Part Number=CPER_10NF_400V_10%_500-300X720X650, Pin Count=2, SMD=No, Socket=No, Status=None, Table="Capacitors THD"
Q1: "0057-0038-2"
Q2: library part "XTAL_6MHZ_RAKON_HC49/4H SMX_20/50/10/16", "0900-0050-1", Manufacturer=RAKON, Manufacturer Part Number="6MHz HC49/4H SMX 20/50/10/16", Author="CERN DEM JMW", ComponentHeight=4.3mm, Component Type=Standard, CreateDate=7/10/2551, HelpURL=\\cern.ch\dfs\Applications\Altium\Datasheets\XTAL_RAKON_HC49-4HSMX.pdf, LatestRevisionDate=3/6/2553, Mounted=Yes, PackageDescription="HC49/4H SMX Case, SMD Cristal, Body 11.6x4.9mm", Part Description="Tolerance:± 20ppm, Stability:± 50ppm, -10°C to +70°C, 16pF, Surface Mount Quartz Crystal, HC49/4HSMX Serie", Part Number="XTAL_6MHZ_RAKON_HC49/4H SMX_20/50/10/16", Pin Count=2, SMD=Yes, Socket=No, Table="Crystals & Oscillators"
R1 R2 R3 R4 R7 R8 R9 R10 R17 R18 R19 R22 R23 R24 R25 R26: library part R0805_330R_1%_0.125W_100PPM, "0150-3297-4", Case=0805, Manufacturer=GENERIC, Manufacturer1 ComponentHeight=0.6mm, Manufacturer1 Example="NIC COMPONENT", Manufacturer1 Part Number=NRC10F3300TRF, Power=0.125W, Tolerance=±1%, Author="CERN DEM JLC", Component Type=Standard, CreateDate=3/12/2550, HelpURL=\\cern.ch\dfs\Applications\Altium\Datasheets\R0805_NIC_NRC.pdf, LatestRevisionDate=13/3/2551, Manufacturer Part Number=R0805_330R_1%_0.125W_100PPM, Mounted=Yes, Part Description="General Purpose Thick Film Chip Resistor", Part Number=R0805_330R_1%_0.125W_100PPM, Pin Count=2, SMD=Yes, Socket=No, Status=Preferred, Table="Resistors SMD", TC=±100ppm/°C
R5 R6: library part R0805_27R_1%_0.125W_100PPM, "0150-4381-1", Case=0805, Manufacturer=GENERIC, Manufacturer1 ComponentHeight=0.6mm, Manufacturer1 Example="NIC COMPONENT", Manufacturer1 Part Number=NRC10F27R0TRF, Power=0.125W, Tolerance=±1%, Author="CERN DEM JLC", Component Type=Standard, CreateDate=3/12/2550, HelpURL=\\cern.ch\dfs\Applications\Altium\Datasheets\R0805_NIC_NRC.pdf, LatestRevisionDate=13/3/2551, Manufacturer Part Number=R0805_27R_1%_0.125W_100PPM, Mounted=Yes, Part Description="General Purpose Thick Film Chip Resistor", Part Number=R0805_27R_1%_0.125W_100PPM, Pin Count=2, SMD=Yes, Socket=No, Status=Preferred, Table="Resistors SMD", TC=±100ppm/°C
R11 R14 R15 R20 R21 R29 R31 R32 R33 R34: library part R0805_10K_0.1%_0.1W_10PPM, "0176-0426-3", Case=0805, Manufacturer=GENERIC, Manufacturer1 ComponentHeight=0.6mm, Manufacturer1 Example="TYCO HOLSWORTHY", Manufacturer1 Part Number=RN73C2A10KBTG, Power=0.1W, Tolerance=±0.1%, Author="CERN DEM JLC", Component Type=Standard, CreateDate=3/12/2550, HelpURL=\\cern.ch\dfs\Applications\Altium\Datasheets\R0805_Tyco_RN73.pdf, LatestRevisionDate=13/3/2551, Manufacturer Part Number=R0805_10K_0.1%_0.1W_10PPM, Mounted=Yes, Part Description="Thin Film Chip Resistor", Part Number=R0805_10K_0.1%_0.1W_10PPM, Pin Count=2, SMD=Yes, Socket=No, Status="Not recommended", Table="Resistors SMD", TC=±10ppm
R12: library part R0805_510R_1%_0.125W_100PPM, "Resistor - 1%", Case=0805, Manufacturer=GENERIC, Manufacturer1 ComponentHeight=0.6mm, Manufacturer1 Example="NIC COMPONENT", Manufacturer1 Part Number=NRC10F5100TRF, Power=0.125W, Tolerance=±1%, Author="CERN DEM JLC", Component Type=Standard, CreateDate=3/12/2550, HelpURL=\\cern.ch\dfs\Applications\Altium\Datasheets\R0805_NIC_NRC.pdf, LatestRevisionDate=13/3/2551, Manufacturer Part Number=R0805_510R_1%_0.125W_100PPM, Mounted=Yes, Part Description="General Purpose Thick Film Chip Resistor", Part Number=R0805_510R_1%_0.125W_100PPM, Pin Count=2, SMD=Yes, Socket=No, Status=Preferred, Table="Resistors SMD", TC=±100ppm/°C
R13: library part R0805_220R_1%_0.125W_100PPM, "0150-1917-5 Resistor - 1%", Case=0805, Manufacturer=GENERIC, Manufacturer1 ComponentHeight=0.6mm, Manufacturer1 Example="NIC COMPONENT", Manufacturer1 Part Number=NRC10F2200TRF, Power=0.125W, Tolerance=±1%, Author="CERN DEM JLC", Component Type=Standard, CreateDate=3/12/2550, HelpURL=\\cern.ch\dfs\Applications\Altium\Datasheets\R0805_NIC_NRC.pdf, LatestRevisionDate=13/3/2551, Manufacturer Part Number=R0805_220R_1%_0.125W_100PPM, Mounted=Yes, Part Description="General Purpose Thick Film Chip Resistor", Part Number=R0805_220R_1%_0.125W_100PPM, Pin Count=2, SMD=Yes, Socket=No, Status=Preferred, Table="Resistors SMD", TC=±100ppm/°C
R16: library part R0805_1M_1%_0.125W_100PPM, "Resistor - 1%", Case=0805, Manufacturer=GENERIC, Manufacturer1 ComponentHeight=0.6mm, Manufacturer1 Example="NIC COMPONENT", Manufacturer1 Part Number=NRC10F1004TRF, Power=0.125W, Tolerance=±1%, Author="CERN DEM JLC", Component Type=Standard, CreateDate=3/12/2550, HelpURL=\\cern.ch\dfs\Applications\Altium\Datasheets\R0805_NIC_NRC.pdf, LatestRevisionDate=13/3/2551, Manufacturer Part Number=R0805_1M_1%_0.125W_100PPM, Mounted=Yes, Part Description="General Purpose Thick Film Chip Resistor", Part Number=R0805_1M_1%_0.125W_100PPM, Pin Count=2, SMD=Yes, Socket=No, Status=Preferred, Table="Resistors SMD", TC=±100ppm/°C
R27 R28: library part R0805_20K_1%_0.125W_100PPM, "0176-0560-6", Case=0805, Manufacturer=GENERIC, Manufacturer1 ComponentHeight=0.6mm, Manufacturer1 Example="NIC COMPONENT", Manufacturer1 Part Number=NRC10F2002TRF, Power=0.125W, Tolerance=±1%, Author="CERN DEM JLC", Component Type=Standard, CreateDate=3/12/2550, HelpURL=\\cern.ch\dfs\Applications\Altium\Datasheets\R0805_NIC_NRC.pdf, LatestRevisionDate=13/3/2551, Manufacturer Part Number=R0805_20K_1%_0.125W_100PPM, Mounted=Yes, Part Description="General Purpose Thick Film Chip Resistor", Part Number=R0805_20K_1%_0.125W_100PPM, Pin Count=2, SMD=Yes, Socket=No, Status=Preferred, Table="Resistors SMD", TC=±100ppm/°C
R30 R35 R36 R37 R38: library part R0805_1K_1%_0.125W_100PPM, "0176-0313-5", Case=0805, Manufacturer=GENERIC, Manufacturer1 ComponentHeight=0.6mm, Manufacturer1 Example="NIC COMPONENT", Manufacturer1 Part Number=NRC10F1001TRF, Power=0.125W, Tolerance=±1%, Author="CERN DEM JLC", Component Type=Standard, CreateDate=3/12/2550, HelpURL=\\cern.ch\dfs\Applications\Altium\Datasheets\R0805_NIC_NRC.pdf, LatestRevisionDate=13/3/2551, Manufacturer Part Number=R0805_1K_1%_0.125W_100PPM, Mounted=Yes, Part Description="General Purpose Thick Film Chip Resistor", Part Number=R0805_1K_1%_0.125W_100PPM, Pin Count=2, SMD=Yes, Socket=No, Status=Preferred, Table="Resistors SMD", TC=±100ppm/°C
T1 T2 T3 T4 T5: library part BSR18A, "0235-0223-4", Case=SOT23-3, Manufacturer="FAIRCHILD SEMICONDUCTOR", Author="CERN DEM JLC", ComponentHeight=1.3mm, Component Type=Standard, CreateDate=15/5/2551, Device=BSR18A, HelpURL=\\cern.ch\dfs\Applications\Altium\Datasheets\BSR18A.pdf, LatestRevisionDate=15/5/2551, Manufacturer Part Number=BSR18A, Mounted=Yes, PackageDescription="SOT23 3-Leads, Pitch 0.95mm - Body 1.4x3mm, IPC Medium Density", Part Description="40V 200mA PNP General-Purpose Amplifier", Part Number=BSR18A, Pin Count=3, SMD=Yes, Socket=No, Table=Transistors
TR1: library part "TME 2405S", "0658-0026-9 Isolated"

## Via types
v1: diameter 40, hole 20, Top Layer to Bottom Layer, tented both sides, 64 vias
v2: diameter 36, hole 20, Top Layer to Bottom Layer, tented both sides, 46 vias
v3: diameter 50, hole 28, Top Layer to Bottom Layer, tented both sides, 1 vias

## Nets (pads, with @x,y where several pads share a name; then routed paths per layer and width w, separated by ;. In a path a pad name is that pad's centre, name@x,y a point inside that pad or via, vN(x,y) a via of type N, cw(c..) or ccw(c..) an arc to the next point about the centre after c; other vN are vias at no path point)
+12: B1.1 C1.1 C2.1 C17.1 C18.1 IC5.3 J5.11 J5.12 J5.13 J5.14 J8.11 J8.13 LS1.1 R1.2 R2.2 R3.2 R4.2 R7.2 R8.2 R9.2 R10.2 R29.2 R31.2 R32.2 R33.2 R34.2 TR1.2 | length 16283.1
  Top Layer w15: R32.2@1748.63,3984.63 R32.2@1748.63,4000 ; v2@2385.63,3930.37 v2(2386,3930)
  Top Layer w30: TR1.2@763,2935 463,2935 J8.13@413,2885 J8.11@413,2785 598,2785 787,2596 C17.1@849,2596 ; C17.1@844,2595 856,2595 951,2500 951,2352 C18.1@897,2298 ; R10.2@1027,3940.63 1378.26,3940.63 1394.31,3956.69 ; J5.11@1091,4370.47 J5.12@1091,4470.47 J5.14@1191,4470.47 ; J5.13@1191,4370.47 J5.14@1191,4470.47 ; v2(1381,3434) 1381,3363.37 R1.2@1382,3362.37 ; v2(1411,3934) 1394.31,3950.69 1394.31,3956.69 ; R31.2@1435.63,3998 1394.31,3956.69 ; v2(1698,3934) R32.2@1748.63,3984.63 ; R2.2@1714,3362.37 1715,3363.37 v2(1715,3434) ; v2(1975,3777) 2030,3832 v2(2030,3931) 2060.63,3961.63 R33.2@2060.63,4009 ; v2(2045,3452) 2045,3368.37 2049,3364.37 R3.2@2047,3362.37 ; v2(2310,3804) 2386,3880 v2(2386,3930) ; R4.2@2378,3362.37 2383,3367.37 v2(2383,3434) ; v2@2385.63,3930.37 R34.2@2385.63,4010 ; R8.2@2715,3362.37 2717,3364.37 v2(2717,3434) ; LS1.1@2968.21,1469 2968.21,1755.21 3037.37,1824.37 R29.2@3037.37,1954 ; IC5.3@2987.45,3740.17 2987.45,3825.88 C2.1@3021.57,3860 2822.33,4059.24 C1.1@2822.33,4096 3066,4339.67 B1.1@3066,4372 2858,4580 1300.53,4580 J5.14@1191,4470.47 ; R7.2@3050,3362.37 3051,3363.37 v2(3051,3434) 3175,3310 v2(3175,2814)
  Bottom Layer w15: v2@2379,3430 v2(2383,3434) ; 2715,3167 2717,3169 ; B1.1@2995,4372 B1.1@3066,4372
  Bottom Layer w30: J8.13@413,2885 494,2885 755,3146 1715,3146 ; 1381,3152 v2(1381,3434) ; v2(1411,3934) v2(1698,3934) 1855,3777 v2(1975,3777) ; v2(1715,3434) 1715,3146 ; v2(2030,3931) 2157,3804 v2(2310,3804) ; v2@2379,3430 2379,3167 ; v2(2386,3930) 2672,4216 2839,4216 B1.1@2995,4372 ; 2717,3169 v2(2717,3434) ; LS1.1@2968.21,1469 3175,1675.79 v2(3175,2814) ; B1.1@3066,4372 2723,4029 2723,3878 3051,3550 v2(3051,3434) 3051,3247 2971,3167 2715,3167 2379,3167 ; 1715,3146 1912,3146 2049,3283 2045,3287 v2(2045,3452) 2045,3491 2076,3522 2160,3522 2183,3499 2183,3288 2304,3167 2379,3167
AUTOMAN_btn: D6.1 J6.13 J6.14 | length 1589.1
  Top Layer w20: D6.1@2960,3400.9 v1(2960,3460)
  Bottom Layer w20: J6.14@1983,4470.47 J6.13@1983,4370.47 1983,4241 2764,3460 v1(2960,3460)
Btn_DW: IC9.4 IC11.57 J4.6 | length 8454.2
  Top Layer w10: IC11.57@1572.5,1646.84 1695.16,1646.84 1745,1597 2306,1597 2749,1154 v1(2835,1154)
  Top Layer w20: IC9.4@924,3791.83 v1(924,3891)
  Bottom Layer w10: v1(924,3891) 924,4005 1246,4327 1246,4481 1498,4733 3162,4733 3237,4658 3237,1953.04 3237,1891.96 3237,1569 2835,1167 v1(2835,1154) ; J4.6@3143,1043 J4.6@3143,1067
  Bottom Layer w20: v1(2835,1154) 3056,1154 J4.6@3143,1067
Btn_EN: IC7.4 IC11.58 J4.3 | length 4277.9
  Top Layer w10: IC11.58@1572.5,1666.53 1711.47,1666.53 1761,1617 2696,1617 2846,1467 2846,1287 2994,1139 2994,992 J4.3@3043,943
  Top Layer w20: IC7.4@2714.2,2824.83 3130,2409.03 v1(3130,1374)
  Bottom Layer w20: J4.3@3043,943 3106,880 3175,880 3202,907 3202,1302 v1(3130,1374)
Btn_UP: IC8.4 IC11.56 J4.5 | length 8457.8
  Top Layer w10: IC11.56@1572.5,1627.16 1680.84,1627.16 1730,1578 2264,1578 2738,1104 2880,1104 v1(2880,1108)
  Top Layer w20: IC8.4@1236,3799.83 v1(1236,3891)
  Bottom Layer w10: v1(1236,3891) 1266,3921 1266,4468 1512,4714 3148,4714 3215,4647 3215,1951 3215,1594 2790,1169 2790,1134 2816,1108 v1(2880,1108) 3062,1108 3094,1076 3094,992 J4.5@3143,943
Buzzer: IC11.40 IC17.2 | length 2362.1
  Top Layer w10: IC11.40@1344.16,1418.5 1344.16,1296.97 1455.12,1186 2128,1186 2320,1378 v1(2320,1392)
  Top Layer w20: v1(2646,2308.17) IC17.2@2720,2308.17
  Bottom Layer w20: v1(2320,1392) 2646,1718 v1(2646,2308.17)
Command_out1: C22.1 IC11.55 J7.5 J7.6 | length 5646.7
  Top Layer w10: IC11.55@1572.5,1607.47 1667.53,1607.47 1714,1561 1937,1561 v1(1980,1518) 2013,1485 C22.1@2013,1429.43
  Bottom Layer w10: v1(1980,1518) 2024,1474 2327,1474 2570,1717 2570,2381 2613,2424 2908,2424 3085,2601 3085,2835 3170,2920 3170,4634 3124,4680 2496,4680 2375,4559 J7.6@2375,4470.47
  Bottom Layer w20: J7.5@2375,4370.47 J7.6@2375,4470.47
Command_out2: C23.1 IC11.54 J7.3 J7.4 | length 5817.4
  Top Layer w10: IC11.54@1572.5,1587.79 1653.21,1587.79 1697,1544 1893,1544 v1(1919,1518) 1919,1431.43 C23.1@1917,1429.43
  Bottom Layer w10: v1(1919,1518) 1919,1510 1979,1450 2337,1450 2602,1715 2602,2375 2626.5,2399.5 2927.5,2399.5 3110,2582 3110,2824 3193,2907 3193,2966 3193,4639 3135,4697 2423,4697 2275,4549 J7.4@2275,4470.47
  Bottom Layer w20: J7.3@2275,4370.47 J7.4@2275,4470.47
D1_2: D1.2 IC1.2 | length 88.5
  Top Layer w20: D1.2@1280,3266.1 1279,3265.1 IC1.2@1279,3179.17 IC1.2@1280.17,3179.17
D2_2: 
D3.3V: C3.1 C4.1 C19.1 C20.1 IC5.2 IC5.4 IC13.6 J1.2 J1.4 J5.9 J5.10 L1.1 R14.2 R15.2 R17.2 R18.2 R22.2 R23.2 R24.2 R25.2 R26.2 | length 9933.7
  Top Layer w10: R15.2@420,3400 R15.2@426.63,3400 R15.2@430.63,3400 ; R18.2@602.37,3722 R18.2@604.42,3719.95 ; v2@695,3722 v2@717,3700
  Top Layer w20: R17.2@304.37,3403 v2(368,3403)
  Top Layer w30: v2(368,3403) 417,3403 R15.2@420,3400 ; R18.2@602.37,3722 v2@695,3722 ; IC13.6@604.42,3615 R18.2@604.42,3719.95 ; R14.2@717,3637.37 v2@717,3700 ; v2(1231.63,3677.37) R23.2@1335,3677.37 2547.63,3677.37 2751,3474 C4.1@2812.57,3474 ; v2(1944,1245) 2128,1245 2199,1316 v2(2199,1519) ; C19.1@2162.98,2542 2162.98,2196 2276.98,2082 2314,2082 2375,2021 L1.1@2375,1977.57 ; v2(2375,1900) L1.1@2375,1977.57 ; R22.2@2731.63,2423 2589,2423 2586,2426 ; IC5.2@3078,3740.17 IC5.4@3078,3511.83 3011.17,3511.83 2910.58,3612.42 C3.1@2788,3612.42 2788,3536 2812.57,3511.43 C4.1@2812.57,3474 ; L1.1@2375,1977.57 2459.57,1977.57 2586,2104 2586,2426 ; 2586,2426 2586,2695 2538,2743 2538,2898 2604,2964 2740,2964 2812.57,3036.57 C4.1@2812.57,3474
  Bottom Layer w10: J1.4@1231.92,1043 J1.4@1231.92,1059.92 ; v2(1944,1245) v2@1944,1250
  Bottom Layer w30: v2(368,3403) 340,3403 282,3461 282,3577 335,3630 622,3630 v2(704,3712) ; J5.10@991,4470.47 J5.9@991,4370.47 991,4170 704,3883 v2(704,3712) ; J1.2@1131.92,1043 J1.4@1231.92,1043 ; v2@1224,3678 738,3678 v2(704,3712) ; J1.4@1231.92,1059.92 1287,1115 1361,1115 1451,1025 1451,940 1510,881 1891,881 1944,934 v2(1944,1245) ; v2(2199,1519) 2375,1695 v2(2375,1900)
D3_2: 
D4_2: 
D5_2: 
D6_2: 
D7_2: D7.2 IC9.2 | length 92.5
  Top Layer w20: IC9.2@823.1,4147.06 IC9.2@824,4146.17 824,4236.1 D7.2@823.1,4237
D8_2: D8.2 IC8.2 | length 242.2
  Top Layer w20: IC8.2@1136,4154.17 1136,4181 1168,4213 D8.2@1338.1,4213
Digital_in1: IC1.4 IC11.50 | length 1894.6
  Top Layer w10: IC11.50@1572.5,1509.05 1617.95,1509.05 1736,1391 v1(1747,1391)
  Top Layer w20: v1(1379,2708) IC1.4@1379,2824.83
  Bottom Layer w20: v1(1379,2708) 1524,2708 1716,2516 1716,1422 v1(1747,1391)
Digital_in2: IC2.4 IC11.51 | length 1604.6
  Top Layer w10: IC11.51@1572.5,1528.73 1630.27,1528.73 1687,1472 1737,1472 v1(1756,1453) ; IC2.4@1712.8,2824.83 IC2.4@1717,2820.63
  Top Layer w20: v1(1717,2708) IC2.4@1717,2820.63
  Bottom Layer w20: v1(1717,2708) 1756,2669 v1(1756,1453)
Digital_in3: IC3.4 IC11.52 | length 1710.1
  Top Layer w10: IC11.52@1572.5,1548.42 1638.58,1548.42 1692,1495 1790,1495 v1(1807,1478) ; IC3.4@2046.6,2824.83 IC3.4@2047,2824.43
  Top Layer w20: v1(2047,2708) IC3.4@2047,2824.43
  Bottom Layer w20: v1(1807,1478) 1807,2178 2047,2418 v1(2047,2708)
Digital_in4: IC4.4 IC11.53 | length 1980.6
  Top Layer w10: IC11.53@1572.5,1568.1 1645.9,1568.1 1699,1515 1854,1515 v1(1857,1512) ; IC4.4@2380.4,2824.83 IC4.4@2381,2824.23
  Top Layer w20: v1(2381,2708) IC4.4@2381,2824.23
  Bottom Layer w10: v1@1848,1521 v1(1857,1512)
  Bottom Layer w20: v1@1848,1521 1848,2175 2090.5,2417.5 2090.5,2648.5 2150,2708 v1(2381,2708)
DW_btn: D7.1 J6.7 J6.8 | length 891.7
  Top Layer w10: J6.7@1683,4346 J6.7@1683,4370.47
  Top Layer w20: D7.1@960.9,4237 1131,4237 1185,4291 1628,4291 J6.7@1683,4346 ; J6.7@1683,4370.47 J6.8@1683,4470.47
ENT_btn: D5.1 J6.11 J6.12 | length 1476.3
  Top Layer w20: D5.1@2612,3403.9 v1(2612,3460)
  Bottom Layer w20: J6.12@1883,4470.47 J6.11@1883,4370.47 1883,4005 2428,3460 v1(2612,3460)
EXTI1: IC11.8 J8.5 | length 1494.3
  Top Layer w10: v1(1359,2010) 1363.84,2005.16 IC11.8@1363.84,1855.5
  Bottom Layer w20: J8.5@413,2485 670,2485 746,2409 746,2076 812,2010 v1(1359,2010)
EXTI2: IC11.9 J8.6 | length 1350.7
  Top Layer w10: J8.6@313,2485 364,2434 439,2434 873,2000 1300,2000 1344.16,1955.84 IC11.9@1344.16,1855.5